# Altium PCB GT502W_BGS2.PcbDoc (part 2 of 2)
Units mil, origin at the board's own origin, x right, y up, seen from the top; angles counter-clockwise.
Board outline 2072.48 x 2691 mil, 2 copper layers (Top Layer, Bottom Layer), stack 10.556 mil thick; 126 components, 99 nets, 511 pads, 440 vias.
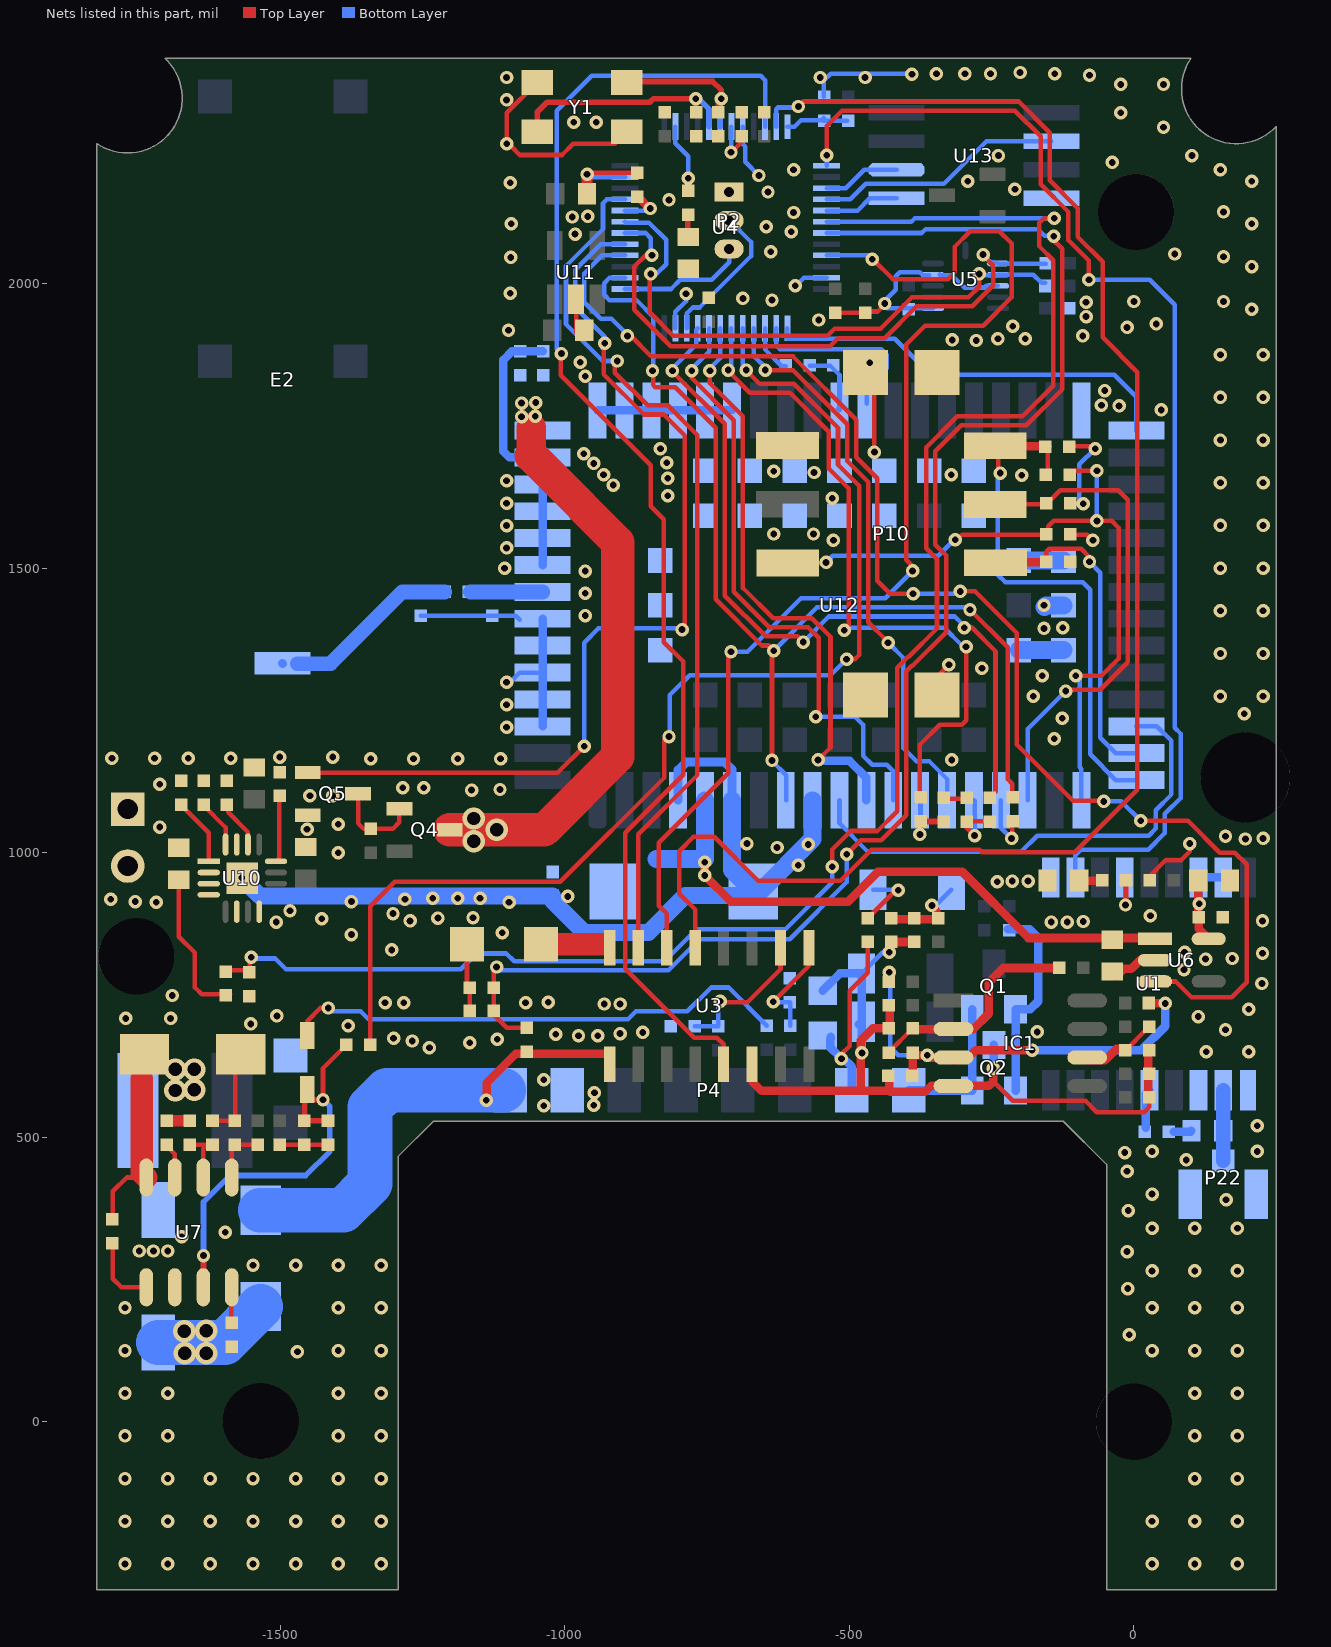
[diagram p2: the nets of this part, all layers, seen from the top]

## Via types
v1: diameter 23.62, hole 11.81, Top Layer to Bottom Layer, 426 vias
v2: diameter 39.37, hole 23.62, Top Layer to Bottom Layer, 11 vias
v3: diameter 16, hole 11.81, Top Layer to Bottom Layer, 3 vias

## Nets (pads, with @x,y where several pads share a name; then routed paths per layer and width w, separated by ;. In a path a pad name is that pad's centre, name@x,y a point inside that pad or via, vN(x,y) a via of type N, cw(c..) or ccw(c..) an arc to the next point about the centre after c; other vN are vias at no path point) (continued)
GND: C2.2 C3.2 C5.1 C6.2 C8.1 C10.2 C11.2 C12.2 C13.2 C14.1 C15.2 C17.2 C18.1 C19.2 C20.1 C21.2 C22.2 C25.1 C40.1 C48.2 C49.1 C51.1 C53.2 C55.2 C56.2 C57.1 C58.1 C59.1 C62.1 C63.1 C68.1 C70.1 C86.1 C90.1 C94.1 C95.1 C96.1 C97.1 C98.1 D2.2 D5.1 D9.2 F3.2 P2.1 P4.2 P10.5 P10.8 P10.9 P10.10 P10.11 P13.1 P22.2 P22.3 Q5.2 R4.1 R11.1 R21.1 R43.2 R44.2 R45.2 R58.1 R68.1 R88.2 R96.1 R98.2 R100.2 R101.2 U1.1 U1.10 U1.12 U4.8 U4.23 U4.35 U4.47 U5.1 U5.4 U5.8 U6.2 U7.7 U10.4 U10.6 U10.8 U10.15 U10.17 U11.2 U12.4 U12.6 U12.9 U12.34 U12.47 U12.48 U12.49 U12.50 U12.51 U12.52 U12.54 U12.55 U12.56 U12.57 U12.58 U12.60 U12.61 U12.62 U12.63 U12.64 U12.81 U12.82 U12.83 U12.84 U12.85 U12.86 U12.88 U12.89 U12.90 U12.91 U12.92 U12.93 U12.94 U12.95 U12.96 U12.97 U12.99 U12.100 U12.101 U12.102 U12.103 U12.104 U12.105 U12.106 U13.4 Y1.2 Y1.4 | length 5438.1
  Top Layer w8: R96.1@-1696,487 -1696,481 -1685.38,470.38 U7.7@-1685.38,429.13 ; C95.1@-1618.4,529 R21.1@-1580.39,529 -1579.6,529 -1579.6,624.6 D5.1@-1581,626 ; C94.1@-1501.21,487 R4.1@-1458.21,487 C86.1@-1416.21,487 ; R68.1@-1172,762.21 F3.2@-1172,839 ; C68.1@-1167,722.21 R68.1@-1167,762.21 ; Y1.2@-1048.74,2353.31 -1102,2300.05 v1(-1102,2246) -1094.23,2246 -1094.23,2241.23 -1079,2226 -1005,2226 -985,2246 -911.95,2246 Y1.4@-891.26,2266.69 ; U11.2@-980,1966.76 -980,1914 C17.2@-970,1904 ; v1(-961,2192) -958,2195 R11.1@-872.79,2195 ; v1@-659,2187 v1(-659,2190) ; C18.1@-525.21,1949 -477,1949 -475,1951 -450,1951 v1@-439,1962 ; P10.9@-471.91,1843.89 -456,1827.98 v1(-456,1704) ; v1@-461,1701 v1@-461,1704 ; P10.8@-345.92,1276.96 -345.92,1309.08 v1(-325,1330) ; R101.2@-340.67,1095 R100.2@-295.33,1095 ; C57.1@-112,1613.79 -89.79,1613.79 v1(-89,1613) ; C59.1@-109,1559 -82,1559 v1(-72,1549) ; C56.2@-109,1714 -72,1714 v1(-68,1710) ; C55.2@26,957 56,987 83,987 98,1002 v1@98,1018
  Top Layer w15: C96.1@-30,783 -17.29,795.71 -4.71,795.71 U6.2@10.58,811
  Top Layer w19.68: C19.2@-961,2158 v1@-961,2190
  Bottom Layer w8: C62.1@-1253,1416 C63.1@-1128,1416 -1086,1416 U12.60@-1079,1409 ; v1@-1098,1298 -1079.51,1316.49 U12.62@-1039,1316.49 ; v1(-961,2192) -956.37,2187.37 U4.47@-894.26,2187.37 ; U4.35@-805.68,1921.62 -805.68,1950.47 -787,1969.15 -787,1980 v1@-789,1982 ; U4.8@-687.57,2275.95 -687.57,2245.24 -683.19,2240.86 -683.19,2214.19 v1(-659,2190) ; v1@-593,1997 -579.8,2010.2 U4.23@-539.93,2010.2 ; C98.1@-545,2328 -545,2357 -533,2369 -391,2369 v1(-390,2368) ; R98.2@-486,1856.79 -468.21,1856.79 v1(-464,1861) ; v1@-438,1970 -418.79,1989.21 -418.79,2012.97 -411.76,2020 -376.41,2020 -371.41,2015 U5.4@-359.3,2015 ; v1@-433,1957 -432.63,1956.63 U5.1@-353.09,1956.63 ; U5.4@-341,2016 -340,2015 -320,2015 -298.19,1993.19 -262.14,1993.19 -259.33,1996 U5.8@-238.91,1996 ; v1(-72,1549) v1@-70,1549 ; v1(-68,1710) -95.72,1682.28 -95.72,1619.72 v1(-89,1613) ; v1(-89,1613) -87,1613 v1(-89,1613)
  Bottom Layer w15: U12.64@-1039,1222 U12.63@-1039,1269.24 U12.62@-1039,1316.49 U12.61@-1039,1363.73 U12.60@-1039,1410.98 ; U12.58@-1039,1505.46 U12.57@-1039,1552.71 U12.56@-1039,1599.95 U12.55@-1039,1647.2 U12.54@-1039,1694.44 -1097.44,1694.44 -1108,1705 -1108,1866 -1093,1881 C49.1@-1078.21,1881 C51.1@-1039,1881 ; U12.52@-942.54,1777.12 U12.51@-895.3,1777.12 U12.50@-848.06,1777.12 U12.49@-800.81,1777.12 U12.48@-753.57,1777.12 U12.47@-706.32,1777.12
  Bottom Layer w15.75: U12.4@-800.81,1092.08 -800.81,1145.19 -787,1159 -719,1159 -706.32,1146.32 U12.6@-706.32,1092.08
  Bottom Layer w30: v1(-1568,956) -1536,924 -1022,924 -1022,915.91 -965.88,859.79 -853.21,859.79 -788,925 -675.95,925 C48.2@-668.95,932
  Bottom Layer w31.5: U12.6@-706.32,1092.08 -706.32,969.37 C48.2@-668.95,932 -656.59,932 -564.59,1024 U12.9@-564.59,1092.08 ; U12.83@-202.39,1355.86 U12.84@-123.65,1355.86 ; U12.91@-202.39,1513.34 U12.92@-123.65,1513.34 ; v1@-156.98,1432 -154.39,1434.6 U12.88@-123.65,1434.6
  other v1: -1773,-250 -1698,-250 -1623,-250 -1548,-250 -1473,-250 -1398,-250 -1323,-250 32,-250 107,-250 182,-250 -1773,-175 -1698,-175 -1623,-175 -1548,-175 -1473,-175 -1398,-175 -1323,-175 32,-175 107,-175 182,-175 -1773,-100 -1698,-100 -1623,-100 -1548,-100 -1473,-100 -1398,-100 -1323,-100 107,-100 182,-100 -1773,-25 -1698,-25 -1398,-25 -1323,-25 107,-25 182,-25 -1773,50 -1698,50 -1398,50 -1323,50 107,50 182,50 -1470,123 -1773,125 -1398,125 -1323,125 32,125 107,125 182,125 -8,153 -1773,200 -1398,200 -1323,200 32,200 107,200 182,200 -11,234 32,265 107,265 182,265 -1548,275 -1473,275 -1398,275 -1323,275 -12,299 -1748,300 -1723,300 -1698,300 -1673,325 -1597,333 32,340 107,340 182,340 -10,371 162,390 32,400 -12,440 92,460 -16,473 32,475 217,475 217,520 -1037,555 -949,556 -948,578 -1037,601 127,650 202,650 -1238,657 -1167,666 -1268,669 -1119,672 -1301,674 -976,678 -942,678 -1016,681 -903,682 -863,684 -170,685 161,689 -1381,696 -1552,699 -1771.65,708.66 -1692.91,708.66 113,712 -1506,713 202,725 -931,734 -903,734 -1316,736 -1283,736 -1069,736 -1029,737 -1690,749 225,770 88,794 126,813 173,814 226,823 89,825 -1304,829 -1375,856 -1110,859 -1507,878 -145,878 -117,878 -89,879 -1272,880 226,880 -1427,884 -1223,885 -1161.42,885.83 29,889 -1302,893 -1483,898 -1718,913 -1098,913 -1755,914 -1375,914 -1798,918 -1281,918 -1232,920 -1188,920 -1149,920 -995,923 -240,949 -214,950 -186,950 -590,978 -1398,1000 -627,1009 -572.17,1014.42 -680,1016 98,1016 196,1024 227,1025 161,1029 -1453,1041 -1712,1045 -1398,1050 -1448,1100 -1408,1100 -1164,1110 -1114,1111 -1285,1114 -1248,1114 -1712,1120 -320,1163 -1341,1165 -1266,1165 -1188,1165 -1113,1165 -1796,1166 -1721,1166 -1662,1166 -1587,1166 -1501,1168 -1408,1168 -140,1200 -1102.36,1220.47 -126,1236 194,1244 -1102.36,1259.84 -177,1275 152,1275 227,1275 -1102.36,1299.21 -161,1311 -267,1324 152,1350 227,1350 -158,1394 -125,1395 -964.04,1416.62 152,1425 227,1425 -158,1435 -964,1455.75 -964.04,1494.88 -1106,1500 152,1500 227,1500 -1102.36,1535.43 -528,1549 -633,1560 -563,1560 -1102.36,1574.8 152,1575 227,1575 -1102.36,1614.17 -530,1623 -819,1627 -915,1646 152,1650 227,1650 -1102.36,1653.54 -819,1658 -197,1663 -932,1664 -321,1664 -562,1668 -633,1670 -949,1684 -821,1685 -967,1701 -832,1710 152,1725 227,1725 48,1778 -26,1785 -57,1786 152,1800 227,1800 -51,1812 -964,1837 -973,1862 152,1875 227,1875 -277,1900 -319,1901 -239,1903 -191,1903 -90,1908 -1099,1918 -12,1923 -213,1925 39.37,1929.13 -554,1936 -84,1942 207,1955 -438,1965 -84,1967 0,1968.5 157.48,1968.5 -636,1971 -687,1974 -787,1982 -1096,1983 -595,1996 207,2030 -1095,2046 157.48,2047.24 72,2052 -638,2056 -982,2087 -602,2091 -646,2100 -1094,2105 207,2105 -987,2117 -960,2118 -598,2125 157.48,2125.98 -817,2147 -643,2161 -209,2166 -1096,2177 -292,2180 207,2180 -598,2200 152,2200 -38,2213 -238,2225 102,2225 52,2275 -984.25,2283.46 -944.88,2283.46 -23,2300 -1102.36,2322.83 -23,2350 52,2350 -1102.36,2362.2 -551.18,2362.2 -472.44,2362.2 -78,2366 -347,2369 -297,2369 -252,2369 -139,2369 -200,2371
GPS_EN: U4.40 U6.3 | length 2361.3
  Top Layer w8: v1(-890,1908) -889,1909 -885,1909 -848,1872 -599,1872 -488,1761 -488,1694.88 -451,1657.88 -451,1478 -428,1455 v1(-388,1455) ; v1(-305,1459) -279,1459 -206,1386 -206,1190 -107,1091 -62,1091 v1@-56,1085 ; v1(12,1056) 95,1056 151,1000 177.33,1000 198,979.33 198,772 172,746 101.2,746 73.6,773.6 U6.3@37,773.6
  Bottom Layer w8: U4.40@-894.26,2049.57 -934.17,2049.57 -966,2017.75 -966,1967.16 -936.84,1938 -918,1938 -889,1909 v1(-890,1908) ; v1(-388,1455) -309,1455 v1(-305,1459) ; v1@-51,1090 -22,1090 v1(12,1056)
  other v1: -53,1090
GSM_CTS: U4.32 U12.12 | length 1079.3
  Top Layer w8: v1@-777,1843.91 -777,1834.14 -703,1760.14 -703,1458.37 -640.63,1396 -572.63,1396 -554,1377.37 -554,1242 v1@-557,1239
  Bottom Layer w8: v1@-777,1850.09 -746.62,1880.46 U4.32@-746.62,1921.62 ; v1@-557,1239 -490,1239 -476.01,1225.01 -476.01,1170.3 -460,1154.29 -434.29,1154.29 -422.86,1142.86 U12.12@-422.86,1092.08
  other v1: -559,1239 -777,1847
GSM_DCD: U4.26 U12.42 | length 332.2
  Bottom Layer w8: U4.26@-628.51,1921.62 -628.51,1891.51 -622,1885 -444,1885 -434,1875 -434,1851 -461,1824 -461,1820.91 -469.5,1812.41 U12.42@-469.5,1789
GSM_DTR: R31.1 U4.27 | length 86.2
  Bottom Layer w8: U4.27@-648.2,1921.62 -648.2,1884.2 -619,1855 R31.1@-611.5,1855
GSM_POWER: R35.1 U4.38 U12.8 | length 1879.2
  Top Layer w8: v1@-845,1846 -845,1821.88 -841.12,1818 -806.12,1818 -735,1746.88 -735,1445.12 -653.88,1364 -642,1364 v1(-633,1355) -636,1352 v1(-636,1162.1) v1@-636,1161.1 ; v1@-289,1428 v1(-288,1427) -222,1361 -222,1129.37 -214,1121.37 R35.1@-214,1095
  Bottom Layer w8: U4.38@-894.26,2010.2 -921.58,2010.2 -930.88,2000.9 -930.88,1980.13 -921.88,1971.12 -874.12,1971.12 -844.88,1941.88 -844.88,1894.12 ; v1@-845,1847 -845,1894 ; v1@-636,1161.1 -611,1136.1 U12.8@-611,1092.08 ; v1(-633,1355) -557,1431 v1@-288,1431
  other v1: -846,1847
GSM_PWR_EN: Q5.1 U4.41 | length 1704.7
  Top Layer w8: Q5.1@-1452,1140.8 -1451.39,1140.19 -1012.81,1140.19 v1@-968.5,1184.5 ; v1@-932,1887 -932,1841 -861,1770 -826,1770 -789,1733 -789,1397 v1@-793,1393
  Bottom Layer w8: v1(-966.04,1187.09) -966.04,1368.96 -941,1394 -804,1394 v1@-800,1390 ; v1@-934,1895 -934,1887 v1@-932,1887 ; v1(-930,1895) -930,1906.37 -982,1958.37 -982,2024.37 -937.12,2069.26 U4.41@-894.26,2069.26
  other v1: -794,1392
GSM_RI: U4.28 U12.14 | length 1009.9
  Top Layer w8: v1(-648,1848) -599,1848 -504,1753 -504,1688.25 -467,1651.25 -467,1405 -434.85,1372.85 v1@-434.85,1370.15
  Bottom Layer w8: U4.28@-667.88,1921.62 -667.88,1872.88 -648,1853 v1(-648,1848) ; v1(-432,1369) -404.95,1341.95 -404.95,1183.19 -382.77,1161 -360,1161 -328.37,1129.37 U12.14@-328.37,1092.08
GSM_RST: U4.25 U12.33 | length 733.3
  Bottom Layer w8: U4.25@-608.83,1921.62 -608.83,1903 -420,1903 -357,1840 -34.69,1840 4.31,1801 U12.33@4.31,1741.68
GSM_RTS: R99.2 U4.33 | length 1340.8
  Top Layer w8: v1@-810,1847 -810,1844.51 -719,1753.51 -719,1451.75 -647.25,1380 -591,1380 v1(-581,1370) ; v1@-298,1396 -285,1396 -243.19,1354.19 -243.19,1106.81 R99.2@-255,1095
  Bottom Layer w8: v1@-809,1848 -809,1853.02 -768.99,1893.03 -768.99,1918.93 U4.33@-766.31,1921.62 ; v1(-581,1370) -536,1415 -315,1415 -301,1401 v1@-301,1397
  other v1: -298,1395 -811,1847
HIGH-PASS: C39.1 IC1.3 R8.2 R37.2 R41.2 | length 808.8
  Top Layer w8: R41.2@-431,772.79 -431,794 v1@-428,797
  Top Layer w15: R37.2@-389,606 -389,644 v1(-363,644) ; v1@-363,643 -360,640 IC1.3@-317,640 -291,640 -278,653 v1(-179,653) ; IC1.3@-317,635 IC1.3@-313,635 ; C39.1@26.5,735 v1(55,735)
  Bottom Layer w8: v1@-428,792 -428,658 -414,644 v1(-363,644)
  Bottom Layer w15: v1(-179,653) 13,653 55,695 v1(55,735)
  other v1: -430,790
LED: R9.2 U4.2 | length 129.7
  Top Layer w8: R9.2@-783,2161 v1(-783,2185) v1@-783,2186
  Bottom Layer w8: U4.2@-805.68,2275.95 -805.68,2246.68 -783,2224 -783,2194.32 -777.68,2189 v1@-783,2186
NetC1_1: C1.1 D5.2 L1.1 U7.8 | length 294.7
  Top Layer w8: C1.1@-1794.21,355.79 -1794.21,405 -1770.07,429.13 U7.8@-1735.38,429.13
  Top Layer w39.37: -1743.72,602.34 -1743.72,437.47 U7.8@-1735.38,429.13
  other v2: -1685,582 -1651,583 -1685,619 -1651,619
NetC1_2: C1.2 U7.1 | length 127.6
  Top Layer w8: C1.2@-1794.21,313.79 -1794.21,251.21 -1779.22,236.22 U7.1@-1735.38,236.22
NetC2_1: C2.1 R5.1 U3.2 | length 255.2
  Top Layer w8: v1@-727,737 -679,737 -621,795 U3.2@-621,833
  Bottom Layer w8: C2.1@-772,695.21 -730.43,695.21 R5.1@-730.21,695 -730.21,735.79 v1(-727,739)
NetC3_1: C3.1 R2.1 U3.1 | length 192
  Top Layer w8: v1(-634,738) -571,801 U3.1@-571,833
  Bottom Layer w8: v1(-634,738) -633,737 C3.1@-604.79,737 -604.21,736.43 R2.1@-604.21,696
NetC6_1: C6.1 U4.7 | length 80.1
  Top Layer w8: v1@-707,2231 -690,2248 C6.1@-690,2259
  Bottom Layer w8: U4.7@-707.26,2275.95 -707.26,2231.26 v1@-707,2231
  other v1: -708,2231
NetC22_1: C22.1 D4.2 U7.2 | length 205.7
  Bottom Layer w78.74: C22.1@-1714.31,139.37 -1630,139.37 -1597.64,139.37 D4.2@-1534.66,202.35
  other v2: -1668,120 -1630,120 -1669,159 -1630,160
NetC34_1: C34.1 R96.2 | length 33.8
  Top Layer w20: R96.2@-1696,529 C34.1@-1662.2,529
NetC34_2: C34.2 C95.2 U7.6 | length 104.6
  Top Layer w8: C34.2@-1662.2,487 C34.2@-1658.99,487 C95.2@-1628.4,487 ; U7.6@-1635.38,429.13 -1635.38,480.02 C95.2@-1628.4,487 ; C95.2@-1618.4,487 C95.2@-1619.19,487 C95.2@-1628.4,487
NetC62_2: C62.2 E2.1 R78.2 | length 312.4
  Bottom Layer w15: E2.1@-1496.38,1332.79 E2.1@-1495.59,1332
  Bottom Layer w26: E2.1@-1470,1332 -1412,1332 -1285.79,1458.21 R78.2@-1211,1458.21
NetC86_2: C86.2 D10.2 R1.2 R4.2 U7.3 | length 738
  Top Layer w8: v1@-1422,566 v1(-1425,566) -1425,621 R1.2@-1384,662
  Top Layer w10: U7.3@-1635.38,236.22 -1635,236.6 v1(-1635,292) ; v1(-1425,566) -1453.21,566 -1457.21,570 -1457.21,530 R4.2@-1458.21,529 C86.2@-1416.21,529
  Bottom Layer w10: v1(-1635,292) -1635,386 -1588.52,432.48 -1455.52,432.48 -1413,475 -1413,554 v1(-1425,566)
NetC90_2: C90.2 U7.4 | length 62.5
  Top Layer w8: C90.2@-1586,174 -1586,235.6 U7.4@-1585.38,236.22
NetC98_2: C98.2 R93.2 U4.12 | length 111.1
  Bottom Layer w8: U4.12@-608.83,2275.95 -596.43,2275.95 -585,2287.38 -548.62,2287.38 C98.2@-545,2291 ; C98.2@-545,2286 C98.2@-544.21,2286 R93.2@-504,2286
NetD1_1: D1.1 R24.1 | length 118.8
  Top Layer w8: R24.1@-467.79,885 -418.79,934 v1(-414,934)
  Bottom Layer w8: D1.1@-458.4,934.67 -414.67,934.67 v1(-414,934)
NetD2_1: D2.1 R9.1 | length 40
  Top Layer w10: D2.1@-784,2082 R9.1@-784,2122
NetD9_1: D9.1 R28.2 | length 30.3
  Top Layer w15: D9.1@-86.16,950.68 -56.02,950.68 R28.2@-55.88,950.82
NetD10_1: D10.1 R3.1 | length 902.3
  Top Layer w8: D10.1@-1453,678.49 -1453,704 -1430,727 v1(-1416,727)
  Bottom Layer w8: v1(-1416,727) -1410,721 -1359,721 -1345,707 -889,707 -875,721 -785,721 -743,763 -712,763 R3.1@-645,696
NetF3_1: F3.1 U3.8 | length 115.5
  Top Layer w39.37: F3.1@-1036,833 F3.1@-1042,839 -935,839
NetIC1_2: IC1.2 R8.1 R38.1 R39.2 | length 399.3
  Top Layer w8: R8.1@-431,648.21 -431,649 R38.1@-389,691 ; R8.1@-429,644.53 -428.16,645.37 R8.1@-428.16,645.84
  Top Layer w15: R38.1@-389,688 -387,690 IC1.2@-317,690 -282,690 -255,717 -255,772 -229.69,797.31 -132.31,797.31 R39.2@-130,795
NetIC1_6: IC1.6 R27.2 R36.2 | length 149
  Top Layer w8: R27.2@-15,652.79 -14.43,652.79 R36.2@22.84,690.05 ; R27.2@-15,655 R27.2@-15,655.47 ; R36.2@22.84,687.84 R36.2@22.84,690.05 ; R36.2@25,701 25,700.53 22.84,698.37 R36.2@22.84,690.05 ; R36.2@27,694.21 R36.2@22.84,690.05
  Top Layer w15: IC1.6@-82,635 -51,635 -31,655 R27.2@-15,655
NetL68_1: L68.1 R77.1 | length 31.9
  Bottom Layer w15: R77.1@69.69,509.63 99.63,509.63 L68.1@101,511
NetL68_2: L68.2 P22.1 U1.11 | length 123.9
  Bottom Layer w26: P22.1@157,458.53 157.09,458.61 U1.11@157.09,582.43
NetQ1_1: Q1.1 Q2.1 R23.1 | length 360
  Bottom Layer w15: R23.1@-222,865 -183,865 -168,850 -168,739 -182,725 Q1.1@-208,725 Q2.1@-208,582
NetQ4_1: Q4.1 Q5.3 R49.2 | length 157.6
  Top Layer w8: Q5.3@-1363.42,1103.4 -1363.42,1051.42 -1353.61,1041.61 R49.2@-1341.34,1041.61 -1302.39,1041.61 -1290.75,1053.25 Q4.1@-1290.75,1077.31
NetR11_2: R11.2 U4.44 | length 80.7
  Top Layer w8: v1@-853,2129 v1(-850,2132)
  Top Layer w15: R11.2@-872,2153 -851,2132 v1(-850,2132)
  Bottom Layer w8: U4.44@-894.26,2128.31 -853.69,2128.31 v1(-850,2132)
NetR19_1: R19.1 R21.2 U7.5 | length 99.1
  Top Layer w8: U7.5@-1585.38,429.13 -1585.38,481.22 -1579.6,487 R19.1@-1540.8,487
NetR28_1: R28.1 U1.4 | length 94
  Top Layer w8: v1(-14.76,908) -13.88,907.12 R28.1@-13.88,950.82
  Bottom Layer w8: U1.4@-16.14,956.44 -14.76,955.06 v1(-14.76,908)
NetR31_2: R31.2 R98.1 U12.43 | length 125
  Bottom Layer w8: R31.2@-569.5,1856 -534,1856 -517.35,1839.35 U12.43@-517.35,1777.12 U12.43@-520,1779.77
NetR33_1: R33.1 R101.1 U12.13 | length 224.3
  Top Layer w8: v1@-376,1031 v1(-376,1032) R33.1@-376,1054
  Top Layer w10: R33.1@-376,1054 R33.1@-375.5,1054.5 ; R33.1@-376,1054.5 R33.1@-375.5,1054.5 ; R101.1@-340.67,1055 R33.1@-374.21,1055 -375,1055 R33.1@-375.5,1054.5 ; R101.1@-335.67,1055 -336.17,1054.5 R33.1@-375.5,1054.5
  Bottom Layer w8: v1@-375.62,1031.38 U12.13@-375.62,1092.08 -375,1091.46 v1@-375,1028
NetR43_1: R43.1 U10.12 | length 117.3
  Top Layer w8: U10.12@-1507.69,984.82 -1501.58,990.94 R43.1@-1501.58,1099.61
NetR44_1: R44.1 U10.14 | length 86.4
  Top Layer w8: R44.1@-1591.75,1086.33 -1591.75,1070.75 -1556.9,1035.9 U10.14@-1556.9,1014.35
NetR45_1: R45.1 U10.16 | length 85.7
  Top Layer w8: R45.1@-1635,1084 -1635,1083 -1596.27,1044.27 U10.16@-1596.27,1014.35
NetR77_2: R77.2 U1.14 | length 68.7
  Bottom Layer w15: R77.2@21,516.32 21,576.26 U1.14@27.16,582.43
NetR88_1: R88.1 U10.1 | length 119.6
  Top Layer w8: R88.1@-1675,1084 -1625.8,1034.8 U10.1@-1625.8,984.82
NetR99_1: R99.1 R100.1 U12.15 | length 134.2
  Top Layer w8: v1(-280,1030) -295.33,1045.33 -295.33,1055 R99.1@-255,1055
  Bottom Layer w8: U12.15@-281.13,1092.08 -280,1090.95 v1(-280,1030)
OSC1: C8.2 U4.5 Y1.3 | length 408.8
  Top Layer w10: Y1.3@-1048.74,2266.69 -1048.74,2301.26 -1031.35,2318.65 -850.7,2318.65 -844.35,2325 v1(-770,2325) C8.2@-770,2301
  Bottom Layer w10: v1(-770,2325) -765,2325 -746.63,2306.63 U4.5@-746.63,2275.95
OSC2: C15.1 U4.6 Y1.1 | length 279.7
  Top Layer w10: Y1.1@-877.26,2355.31 -740.31,2355.31 -725,2340 v1(-725,2325) -730,2320 -730,2301 v1@-730,2325
  Bottom Layer w10: U4.6@-726.95,2275.95 v1@-726.95,2331.95
OUTPUT1: U3.7 U4.45 | length 1554.2
  Top Layer w8: v1(-908,1864) -912,1860 -912,1843.63 -854.37,1786 -819.37,1786 -767,1733.63 -767,1136.54 -871,1032.54 U3.7@-871,833
  Bottom Layer w8: v1(-908,1864) -933.63,1864 -998,1928.37 -998,2031 -933,2096 -933,2141 -926,2148 U4.45@-894.26,2148
OUTPUT2: U3.6 U4.21 | length 2074.8
  Top Layer w8: U3.6@-821,833 -821,893 -835,907 -835,1017.63 -713,1139.63 -713,1351 -710,1351 v1(-708,1353) ; v1(-460,2043) v1@-459.5,2042.5 ; v1@-459,2043 -424,2008 -326,2008 -314.5,2019.5 -314.5,2065.13 -287.63,2092 -236.37,2092 -215,2070.63 -215,1976 -265,1926 -367,1926 -400,1893 -400,1515 -391,1506 v1@-391,1495
  Bottom Layer w8: v1(-708,1353) -679,1353 -585,1447 -437,1447 -391,1493 v1@-390,1493 ; U4.21@-539.93,2049.57 v1@-466.57,2049.57
  other v1: -389,1495
PEAK: C36.1 C37.1 D1.2 R25.1 | length 156.8
  Top Layer w15: R25.1@-423,883 -349,883 -347,885 -347,897 v1@-357,907 ; v1@-359,909 v1@-357,907 ; v1(-354.97,907.31) -356.69,907.31 v1@-357,907
  Bottom Layer w8: v1@-359,909 -346.43,909 D1.2@-320.76,934.67
PWR_EN: R1.1 U4.29 | length 2060.8
  Top Layer w8: R1.1@-1342,662 -1342,906 -1299,949 -1008,949 -825,1132 -825,1198.95 v1@-818.48,1205.48 ; v1(-681,1848) -681,1847.33 -657.86,1824.19 -597.82,1824.19 -520,1746.37 -520,1681.63 -483,1644.63 -483,1347.33 -490.33,1340 v1(-505,1340)
  Bottom Layer w8: v1@-816,1203 -816,1276.38 -780.61,1311.77 -533.23,1311.77 v1(-505,1340) ; U4.29@-687.57,1921.62 -687.57,1854.57 v1(-681,1848)
  other v1: -817,1204
RF_ANT: C63.2 R78.1 U12.59 | length 127.1
  Bottom Layer w26: R78.1@-1166,1458 -1165.78,1458.22 U12.59@-1039,1458.22
RFID_ANT1: P4.8 Q1.2 Q2.2 | length 255
  Bottom Layer w15: P4.8@-395.92,582.28 -395.64,582 Q2.2@-284,582 Q1.2@-284,725
RFID_ANT2: C35.2 P4.7 R24.2 | length 334.7
  Top Layer w8: v1(-514,638) v1@-514,643 ; v1@-511,640 v1@-514,643 ; R24.2@-467.79,843 -467.79,788.71 -499.5,757 -499.5,660.17 -514,645.67 v1@-514,643
  Bottom Layer w15: C35.2@-534,673 -534,658 v1@-518.5,642.5 ; C35.2@-533,673 C35.2@-533,676 ; v1@-514,640 -512,640 -495.92,623.92 P4.7@-495.92,582.28
RFID_CLK: U3.5 U4.11 | length 2856
  Top Layer w8: U3.5@-771,833 -771,900 -799,928 -799,1002.72 -773.97,1027.75 -737.75,1027.75 -661,951 -515.2,951 -461.2,1005 -271.37,1005 -267.05,1000.68 -103.95,1000.68 6,1110.63 6,1844.46 -55,1905.46 -55,2038.63 -99,2082.63 -99,2132.37 -148,2181.37 -148,2265.37 -202.63,2320 -580.74,2320 v1(-589.55,2311.19)
  Bottom Layer w8: U4.11@-628.51,2275.95 -628.51,2306.49 -625.55,2309.45 -591.29,2309.45 v1(-589.55,2311.19)
RFID_DEMOD: U3.13 U4.10 | length 2382.5
  Top Layer w8: v1(-1006,1877) -1005,1877 -1007,1875 -1007,1838.75 -849,1680.75 -849,1609 -826,1586 -826,1370 -792,1336 -792,1137 -893.84,1035.16 -893.84,796.12 -772.72,675 -733,675 -721,663 U3.13@-721,628.28
  Bottom Layer w8: v1(-1006,1877) -1014,1885 -1014,2304 -953,2365 -656,2365 -648.2,2357.2 U4.10@-648.2,2275.95
RFID_GND: C35.1 C36.2 C38.1 D3.2 D6.1 IC1.4 Q2.3 R25.2 R26.2 R27.1 R37.1 R38.2 R40.1 U3.14 | length 1488.2
  Top Layer w8: v1(-430,825) -426.79,828.21 R25.2@-426.79,843 ; -247,598 -213,564 -85,564 -65,544 18,544 27,553 R26.2@27,570.16 ; R26.2@19.84,564 25,569.16 R26.2@25,570.16
  Top Layer w15: U3.14@-671,628.28 -671,598 -654.28,581.28 -480,581.28 ; R38.2@-431,691 -459,691 -480,670 -480,581.28 ; R37.1@-429,606 -430.28,604.72 -430.28,581.28 ; R38.2@-429,691 -429,720 ; R25.2@-426.79,843 C36.2@-385.79,843 ; v1(-247,621) -247,598 -255,590 IC1.4@-317,590 -356.5,590 -367,579.5 -428.5,579.5 -430.28,581.28 ; R26.2@25,570.16 R27.1@25,655 ; -480,581.28 -430.28,581.28
  Bottom Layer w8: D6.1@-478.4,787.67 -441.07,825 v1(-430,825)
  Bottom Layer w15: C35.1@-547,757.37 -516.7,787.67 D6.1@-478.4,787.67 ; D3.2@-483.14,698.2 D3.2@-478.64,693.7 ; v1@-480,648 -478.64,649.36 D3.2@-478.64,693.7 ; D6.1@-478.64,778.69 D3.2@-478.64,702.7 D3.2@-478.64,693.7 ; D6.1@-478.64,787.69 D6.1@-478.53,787.8 ; v1(-247,621) -246,622 Q2.3@-246,662
  other v1: -478,648
SCL: R6.1 U4.42 U5.6 | length 1063.8
  Top Layer w8: v1@-851,2050 -858,2050 -878,2030 -878,1954 -814,1890 -534,1890 -520,1904 -438,1904 -382,1960 -284,1960 -247.19,1996.81 -247.19,2031.19 -260,2044 v1@-267,2044
  Bottom Layer w8: U4.42@-894.26,2088.94 -857.94,2088.94 -849,2080 v1@-849,2050 ; v1@-263,2048 -254.37,2039.37 U5.6@-238.91,2035.37 -238.81,2035.27 R6.1@-154.61,2035.27
  other v1: -847,2050 -265,2051
SD_MISO: U4.16 U13.2 | length 437
  Bottom Layer w8: U4.16@-539.93,2148 -498.24,2148 -471.05,2175.19 -333.81,2175.19 -259,2250 U13.2@-145.17,2250
SD_MOSI: U4.17 U13.5 | length 132.1
  Bottom Layer w8: U4.17@-539.93,2128.31 -485.69,2128.31 -464,2150 U13.5@-416.83,2150
SD_SCK: U4.15 U13.6 | length 136.5
  Bottom Layer w8: U4.15@-539.93,2167.68 -506.32,2167.68 -474,2200 U13.6@-416.83,2200
SDA: R7.1 U4.43 U5.7 | length 1004.7
  Top Layer w8: v1@-851,2017 -851,1949.63 -809.37,1908 -538.63,1908 -525.63,1921 -445,1921 -390,1976 -290.63,1976 -272,1994.63 v1@-272,2015
  Bottom Layer w8: U4.43@-894.26,2108.63 -892.82,2107.19 -852.19,2107.19 -822,2077 -822,2034 -838,2018 -848,2018 v1(-849,2017) ; v1@-272,2015 -239.6,2015 U5.7@-238.91,2015.69 -176.69,2015.69 -162.13,2001.13 R7.1@-155.84,2001.13
  other v1: -272,2017
SENS_BAT: R58.2 R74.1 U4.18 | length 3034.2
  Top Layer w8: R74.1@-1588,793 -1554,793 -1554,813 v1(-1551,816) ; v1(-530,975) -530,1005.52 -497.52,1038 -450.63,1038 -416,1072.63 -416,1325.22 -396.89,1344.33 -395.67,1344.33 -346,1394 -346,1515.63 -365,1534.63 -365,1712.05 -310.28,1766.77 -195.86,1766.77 -142,1820.63 -142,2041.25 -166,2065.25 -166,2107 -158,2115 v1@-143,2115
  Bottom Layer w8: v1@-1553,814 -1509,814 -1490,795 -1182.81,795 -1155,822.81 -1102.81,822.81 -1089,809 -825,809 -769,865 -613,865 -530,948 v1(-530,975) ; U4.18@-539.93,2108.63 -391.37,2108.63 -385.5,2114.5 v1@-139,2114.5
  other v1: -140,2115
SENS_VIN: C68.2 R67.2 R68.2 U4.19 | length 2640.8
  Top Layer w8: v1(-1120,799) -1125,794 R68.2@-1125,762.21 C68.2@-1125,722.21 -1125,715 -1102,692 R67.2@-1067.21,692 ; v1(-504.66,997.19) -479.85,1022 -444,1022 -400,1066 -400,1318.59 -390.26,1328.33 -389.04,1328.33 -330,1387.37 -330,1522.25 -349,1541.25 -349,1705.42 -303.65,1750.77 -189.23,1750.77 -126,1814 -126,2061 -145,2080 v1@-145,2083
  Bottom Layer w8: v1@-1123,799 -1123,796 -1120,793 -818.37,793 -763.37,848 -605,848 -504.66,948.34 v1(-504.66,997.19) ; U4.19@-539.93,2088.94 -373.02,2088.94 -366.15,2095.81 -168.81,2095.81 -157,2084 v1@-151,2084
  other v1: -141,2083
SIM_CLK: C58.2 P10.3 U12.21 | length 592.3
  Top Layer w8: C58.2@-154,1510 C58.2@-153.61,1510.39 ; C58.2@-154,1510.79 -154,1529 -149,1534 -92.62,1534 -78,1519.38 v1(-78,1511)
  Top Layer w15: P10.3@-243.31,1509.45 -242.76,1510 C58.2@-154,1510
  Bottom Layer w8: v1(-78,1511) -59,1492 -59,1201.96 -31.79,1174.76 U12.21@4.31,1174.76
SIM_DATA: C59.2 P10.7 R97.1 U12.19 | length 1293
  Top Layer w8: P10.7@-608.13,1508.85 -542.15,1508.85 v1(-541,1510) ; v1@-310,1551 -302,1559 -151,1559 -150.61,1559.39 -150.61,1573.39 -141,1583 -39,1583 -27,1571 -27,1341 -57,1311 v1(-102,1311) ; R97.1@-111,1671 v1(-65,1671)
  Bottom Layer w8: v1(-541,1510) -529,1522 -344,1522 v1@-316,1550 ; v1(-102,1311) -95,1304 -95,1150 -92.15,1147.15 U12.19@-92.15,1092.08 ; v1(-65,1583) v1(-65,1671)
  other v1: -314,1550
SIM_RST: C57.2 P10.2 U12.17 | length 885.6
  Top Layer w8: P10.2@-243.56,1612 -154,1612 -129.19,1636.81 -27.81,1636.81 -11,1620 -11,1334.37 -59.37,1286 -112.09,1286 -113.09,1287 -117,1287 v1(-120,1284)
  Bottom Layer w8: U12.17@-186.64,1092.08 -186.64,1217.36 v1(-120,1284)
SIM_VDD: C56.1 P10.1 R97.2 U12.20 | length 935.4
  Top Layer w8: P10.1@-242.41,1714 -238,1709.59 -238,1664 v1(-235,1667) ; R97.2@-151,1671 C56.1@-151,1714
  Top Layer w15: P10.1@-242.41,1714 C56.1@-151,1714
  Bottom Layer w8: v1(-235,1667) -239,1667 -239,1488.26 -225.74,1475 -90,1475 -77,1462 -77,1172.72 -31.79,1127.51 U12.20@4.31,1127.51
SWCLK: P2.2 U4.34 | length 259.7
  Bottom Layer w8: U4.34@-785.99,1921.62 -785.99,1947.53 -775.52,1958 -763.28,1958 -672.83,2048.46 -672.83,2073.09 -710.51,2110.77 P2.2@-711.42,2110.77
SWDIO: P2.3 U4.37 | length 225.5
  Bottom Layer w8: U4.37@-894.26,1990.52 -813.48,1990.52 -797,2007 -742,2007 -711.42,2037.58 P2.3@-711.42,2060.77
UART1_RX: U4.31 U12.11 | length 1040.2
  Top Layer w8: v1(-745,1847) -745,1824.76 -687,1766.76 -687,1465 -634,1412 -566,1412 -533.19,1379.19 -533.19,1184.81 v1(-555,1163)
  Bottom Layer w8: v1(-745,1847) -745,1851.09 -726.94,1869.15 U4.31@-726.94,1921.62
  Bottom Layer w15: v1(-555,1163) -553.22,1161.22 -499.61,1161.22 -470.1,1131.72 U12.11@-470.1,1092.08
UART1_TX: R33.2 U4.30 | length 1208.7
  Top Layer w8: v1(-713,1848) -713,1846.33 -674.86,1808.19 -604.44,1808.19 -536,1739.75 -536,1675 -501,1640 -501,1400 v1@-509,1392 ; R33.2@-376,1096 -376,1190 -341,1225 -302.17,1225 -294.55,1232.62 v1@-294.55,1360
  Bottom Layer w8: v1(-713,1848) -707.25,1853.75 U4.30@-707.25,1921.62 ; v1@-508,1395.01 -333.01,1395.01 -302,1364 v1@-297,1364
  other v1: -295,1362 -509,1391
UART2_RX: U1.2 U4.13 | length 2088.4
  Top Layer w8: v1@-539.93,2220.07 v1(-539.93,2225.57) -539.93,2277.07 -513,2304 -209.25,2304 -164,2258.75 -164,2174.75 -115,2125.75 -115,2076 -79,2040 v1(-79,2007)
  Bottom Layer w8: U4.13@-539.93,2207.05 -540,2207.12 -540,2220 v1@-539.93,2220.07 ; U1.2@-102.76,956.44 -102.76,995.24 -93,1005 25,1005 54.47,1034.47 54.47,1068.1 82,1095.63 82,1209.32 72,1219.32 72,1963.01 28.01,2007 v1(-79,2007)
V285: U12.10 U12.22 | length 872.1
  Bottom Layer w8: U12.10@-517.35,1092.08 -517.35,1051.35 -467.19,1001.19 -198.81,1001.19 -170.13,1029.87 25.87,1029.87 38.47,1042.47 38.47,1074.73 66,1102.25 66,1196.41 40.41,1222 U12.22@4.31,1222
VBAT: C25.2 P13.2 R74.2 U10.2 U10.3 | length 268.2
  Top Layer w8: C25.2@-1678.24,952.54 -1678.24,852.24 -1650,824 -1650,763 -1638,751 R74.2@-1588,751
VDDLP: R35.2 U12.16 | length 103.3
  Top Layer w8: v1(-215,1025) -214,1026 R35.2@-214,1053
  Bottom Layer w8: U12.16@-233.88,1092.08 -233.88,1043.88 v1(-215,1025)
VGPS: C40.2 C97.2 U1.7 U1.8 U6.5 | length 200.5
  Top Layer w15: C40.2@113,951 113,887 114,886 114,865.89 U6.5@131.49,848.4
  Bottom Layer w15: v1(115,910) 113.78,911.22 U1.7@113.78,956.44 U1.8@157.09,956.44
VGSM: C48.1 C49.2 C51.2 C53.1 C96.2 Q4.3 U6.1 U12.5 U12.53 | length 2081.6
  Top Layer w15: v1(-754,983) v1(-754,960) -708,914 -502,914 -449.69,966.31 -301.69,966.31 -185.38,850 35.4,850 U6.1@37,848.4
  Top Layer w51.18: -1059,1697.66 -1059,1747
  Top Layer w59.06: Q4.3@-1202.17,1039.91 v2(-1120,1039.91) -1036.09,1039.91 -907,1169 -907,1545.22 -970.34,1608.56 -970.34,1609 -1059,1697.66
  Bottom Layer w31.5: -839,989.05 -753.57,989.05 U12.5@-753.57,1092.08
  other v1: -1076,1766 -1052,1767 -1076,1790 -1051,1791
  other v2: -1160,1020 -1160,1060
VIN: D4.1 P4.1 R67.1 U3.9 | length 877.2
  Top Layer w15: v1@-1137,567 -1137,596 -1086,647 -921,647 U3.9@-921,628.28
  Bottom Layer w78.74: D4.1@-1534.66,371.48 -1389.52,371.48 -1342.34,418.66 -1342.34,552.44 -1312.49,582.28 P4.1@-1108,582.28
  other v1: -1138,565
pads on no net: E2.2 E2.3 E2.4 E2.5 P10.6 U1.3 U1.5 U1.9 U1.13 U1.15 U1.16 U1.17 U1.18 U4.4 U5.2 U5.10 U5.11 U6.4 U10.7 U10.9 U11.4 U12.1 U12.3 U12.7 U12.18 U12.23 U12.24 U12.25 U12.26 U12.27 U12.28 U12.29 U12.30 U12.31 U12.32 U12.35 U12.36 U12.37 U12.38 U12.39 U12.40 U12.41 U12.44 U12.45 U12.46 U12.65 U12.66 U12.67 U12.68 U12.69 U12.70 U12.71 U12.72 U12.73 U12.74 U12.75 U12.76 U12.77 U12.78 U12.79 U12.80 U12.87 U12.98

## Polygon pours and split planes (outlines as drawn)
GND on Bottom Layer "Bottom Layer-GND" (solid, remove dead copper, pour order 1001): -1822.48,-295.16 -1820,1182 -1271,1182 -1143.9,1181.1 -1119,1206 -1121,2398 100.12,2395.84 100.12,2395.76 ccw(c179.94,2341.98) 249.74,2275.72 250,2275.48 249,1466 243.87,1466.01 246,964 250,-295.16 -48,-295.16 -48,532 -1293,532 -1293,-295.16
GND on Top Layer "Top Layer-GND" (solid, remove dead copper, pour order 1000): -1822.48,-295.16 -1821,1182 -1144.06,1181.94 -1118,1208 -1118,2396 100.12,2395.84 100.12,2395.76 ccw(c179.94,2341.98) 249.74,2275.72 250,2275.48 251,1462 250,1462 250,990 248,990 250,-295.16 -48,-295.16 -48,532 -1293,532 -1293,-295.16

## Keep-outs
Keep-Out Layer:
  lines w3.94: -1822.48,2246 -1822.48,-295.16 -1293,-295.16 -1293,466 -1231,528 -124,528 -48,452 -48,-295.16 250,-295.16 250,2275.48 ; -1822.4,2246 ccw(c-1768.63,2325.82) -1702.36,2395.62 ; -1702.36,2395.84 100.12,2395.84 ; 100.12,2395.76 ccw(c179.94,2341.98) 249.74,2275.72

## Other copper
Top Layer:
  rectangle net *DOUT1: -881,543 -841,660
  rectangle net *DOUT2: -829,543 -801,659
  rectangle net VGSM: -1088,1734 -1040,1804
  region net 4V4: -1525,970 -1399,970 -1354,1015 -1290,1015 -1290,989 -1338,941 -1525,941
  region net VBAT: -1610,970 -1610,940 -1780,940 -1800,960 -1800,986 -1780,1006 -1752,1006 -1716,970
  region net 5V: -1542,999 -1542,1041 -1565,1064 -1565,1110 -1526,1110 -1526,1005 -1532,999
  region net VGSM: -1225,1052 -1197,1080 -1105,1080 -1100,1075 -1100,1010 -1110,1000 -1195,1000 -1225,1030
  region net NetC22_1: -1700,270 -1700,110 -1690,100 -1620,100 -1610,110 -1610,175 -1616,181 -1655,181 -1674,200 -1674,270
  region net NetC1_1: -1788,641 -1629,641 -1629,562 -1788,562
Bottom Layer:
  rectangle net GND: -1264,1397 -1088,1427
  rectangle net *DOUT1: -900,543 -841,622
  rectangle net *DOUT2: -830,543 -802,621
  region net 5V: -1530,1080 -1525,1075 -1525,1045 -1530,1040 -1540,1040 -1565,1065 -1565,1075 -1560,1080
  region net VGSM: -1088,1726 -1088,1850 -1025,1850 -1025,1726
  region net VGSM: -1170,1080 -1180,1070 -1180,1010 -1118,948 -737,948 -737,1032 -1057,1032 -1105,1080
  region net NetC1_1: -1790,650 -1632,650 -1632,562 -1790,562

## Silkscreen, mask and mechanical layers (free items; w line width, h text height)
Top Overlay:
  drawing of 190 lines, arcs and shapes, not listed
  text "GT502W" at -1697,1448 h150 r90
  text "Connected world!" at -1325,1280 h63 r90
Bottom Overlay:
  rectangle: -980,1323 -940,1395
  rectangle: -984,1381 -783,1408
  rectangle: -781,1146 -246,1176
  rectangle: -784,1224 -246,1253
  rectangle: -492,1145 -464,1321
  rectangle: -414,1147 -384,1316
  rectangle: -97,1218 -50,1545
  rectangle: -255,1145 -49,1332
  rectangle: -231,1459 -49,1489
  rectangle: -254,1542 -50,1724
  rectangle: -983,1145 -781,1328
  rectangle: -800,1303 -228,1563
  text "GSM ANT" at -1280,1927 h25 r90
  text "IN2" at -669,780 h60 r90
  text "GND" at -976,752 h60 r90
  text "12V" at -1075,729 h60 r90
  text "O1" at -876,697 h60 r90
  text "IN1" at -630,611 h50 r90
  text "O2" at -729,610 h50 r90
  text "RF" at -563,606 h50 r270
  text "RF" at -462,604 h50 r270
  text "GPS" at 95,300 h25
Mechanical 15:
  lines w7.87: -1620.61,93.71 -77.31,93.71 -77.31,2219.69 -1620.61,2219.69 -1620.61,93.71

## Text inside footprints (layer, text, board x,y; h text height)
L1: Bottom Overlay "5.6uH" at -1581.88,678.35 h25